# Altium PCB PCB1.PcbDoc (part 1 of 2)
Units mil, origin at the board's own origin, x right, y up, seen from the top; angles counter-clockwise.
Board outline 3937.01 x 3937.01 mil, 2 copper layers (Top Layer, Bottom Layer); 101 components, 66 nets, 397 pads, 63 vias.
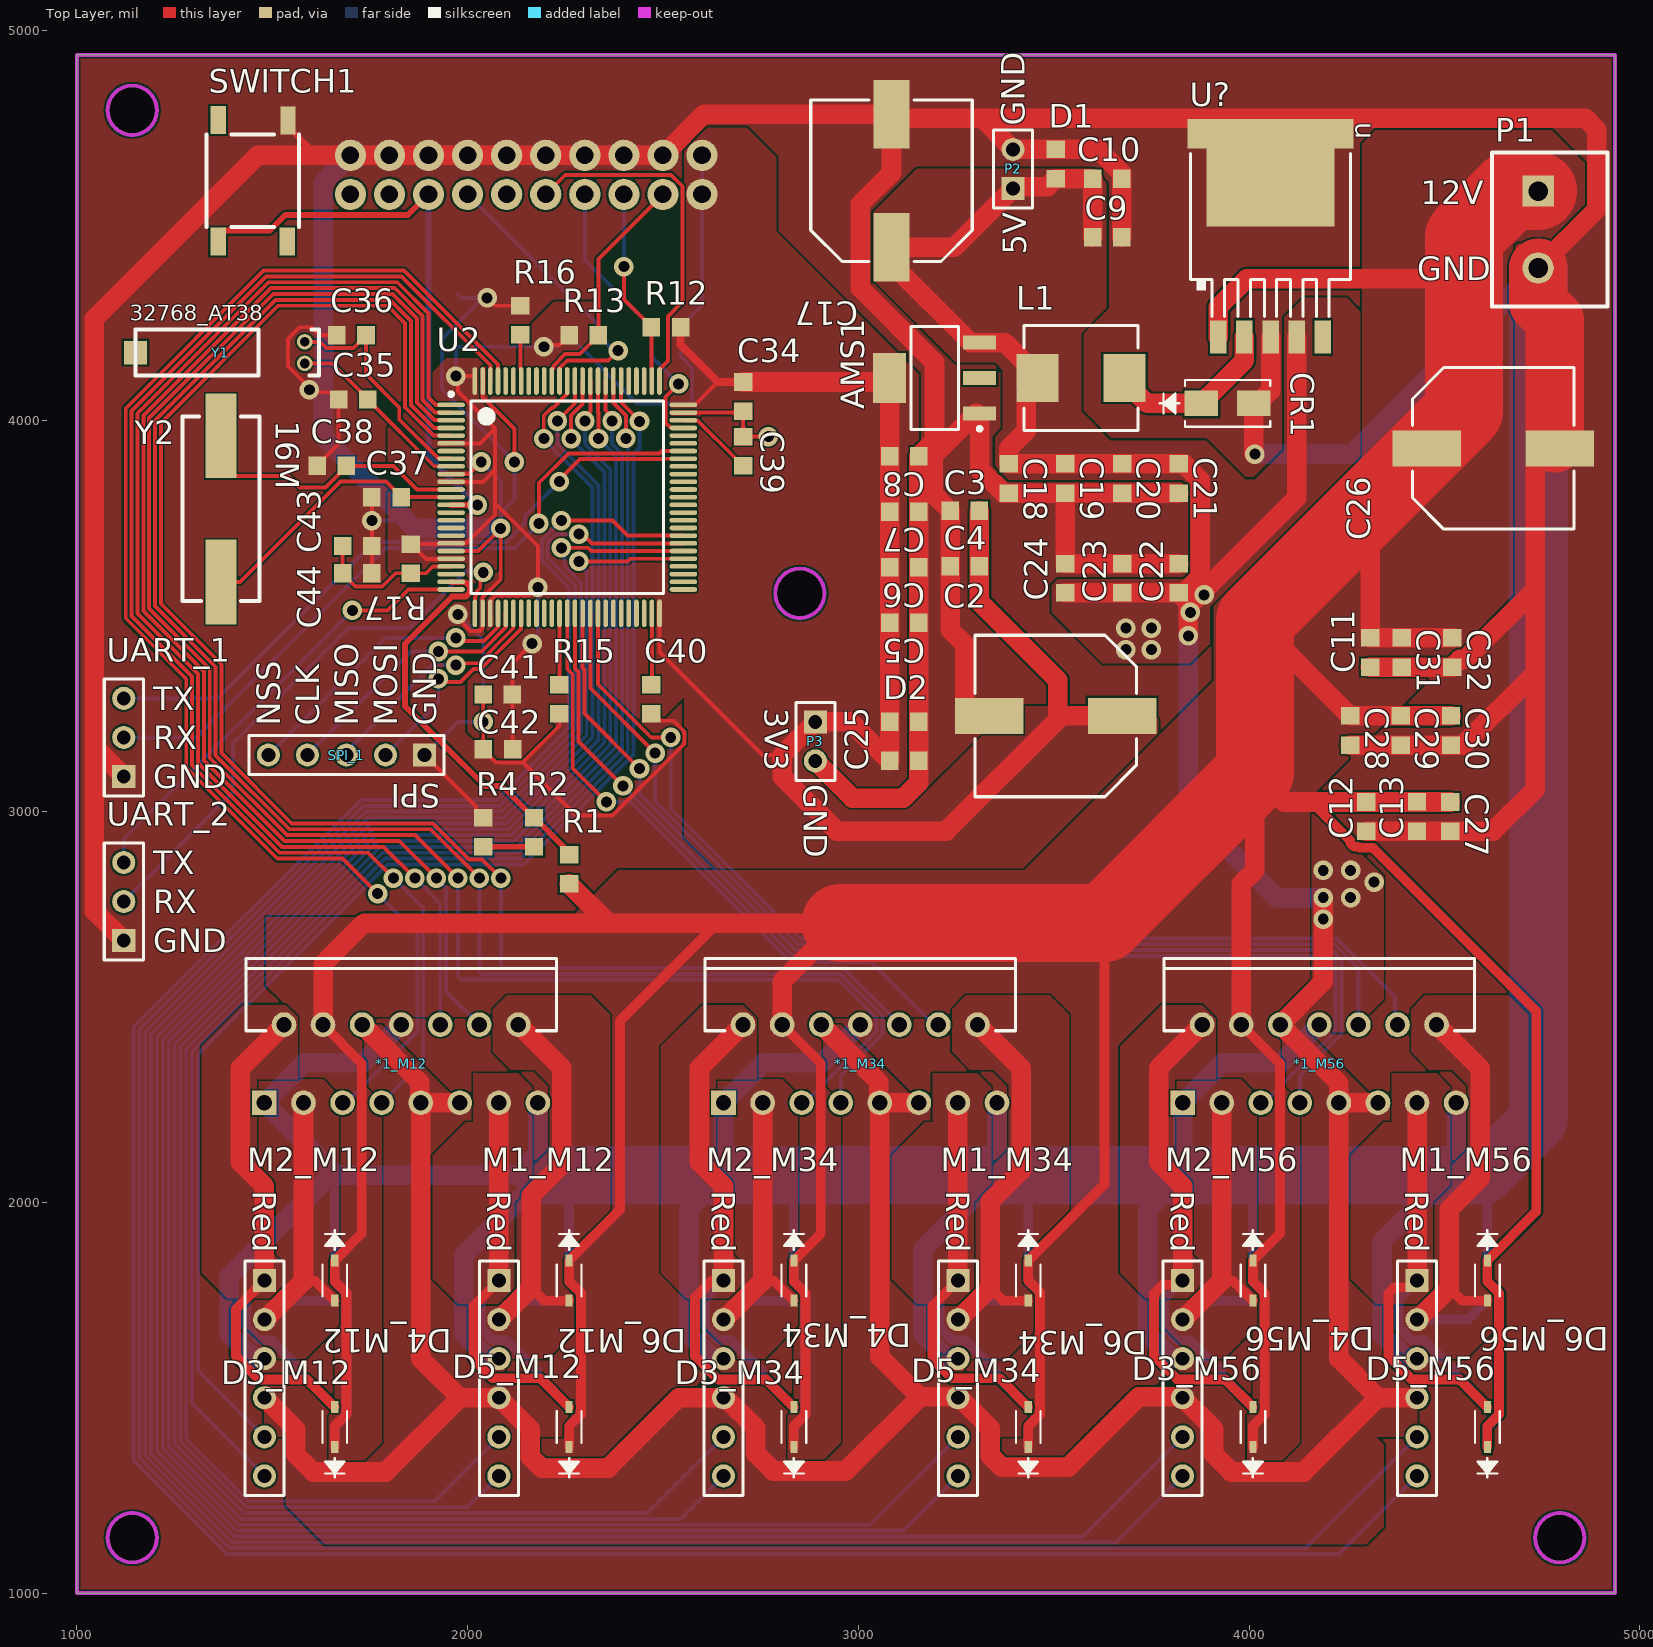
[diagram p0: Top Layer view]
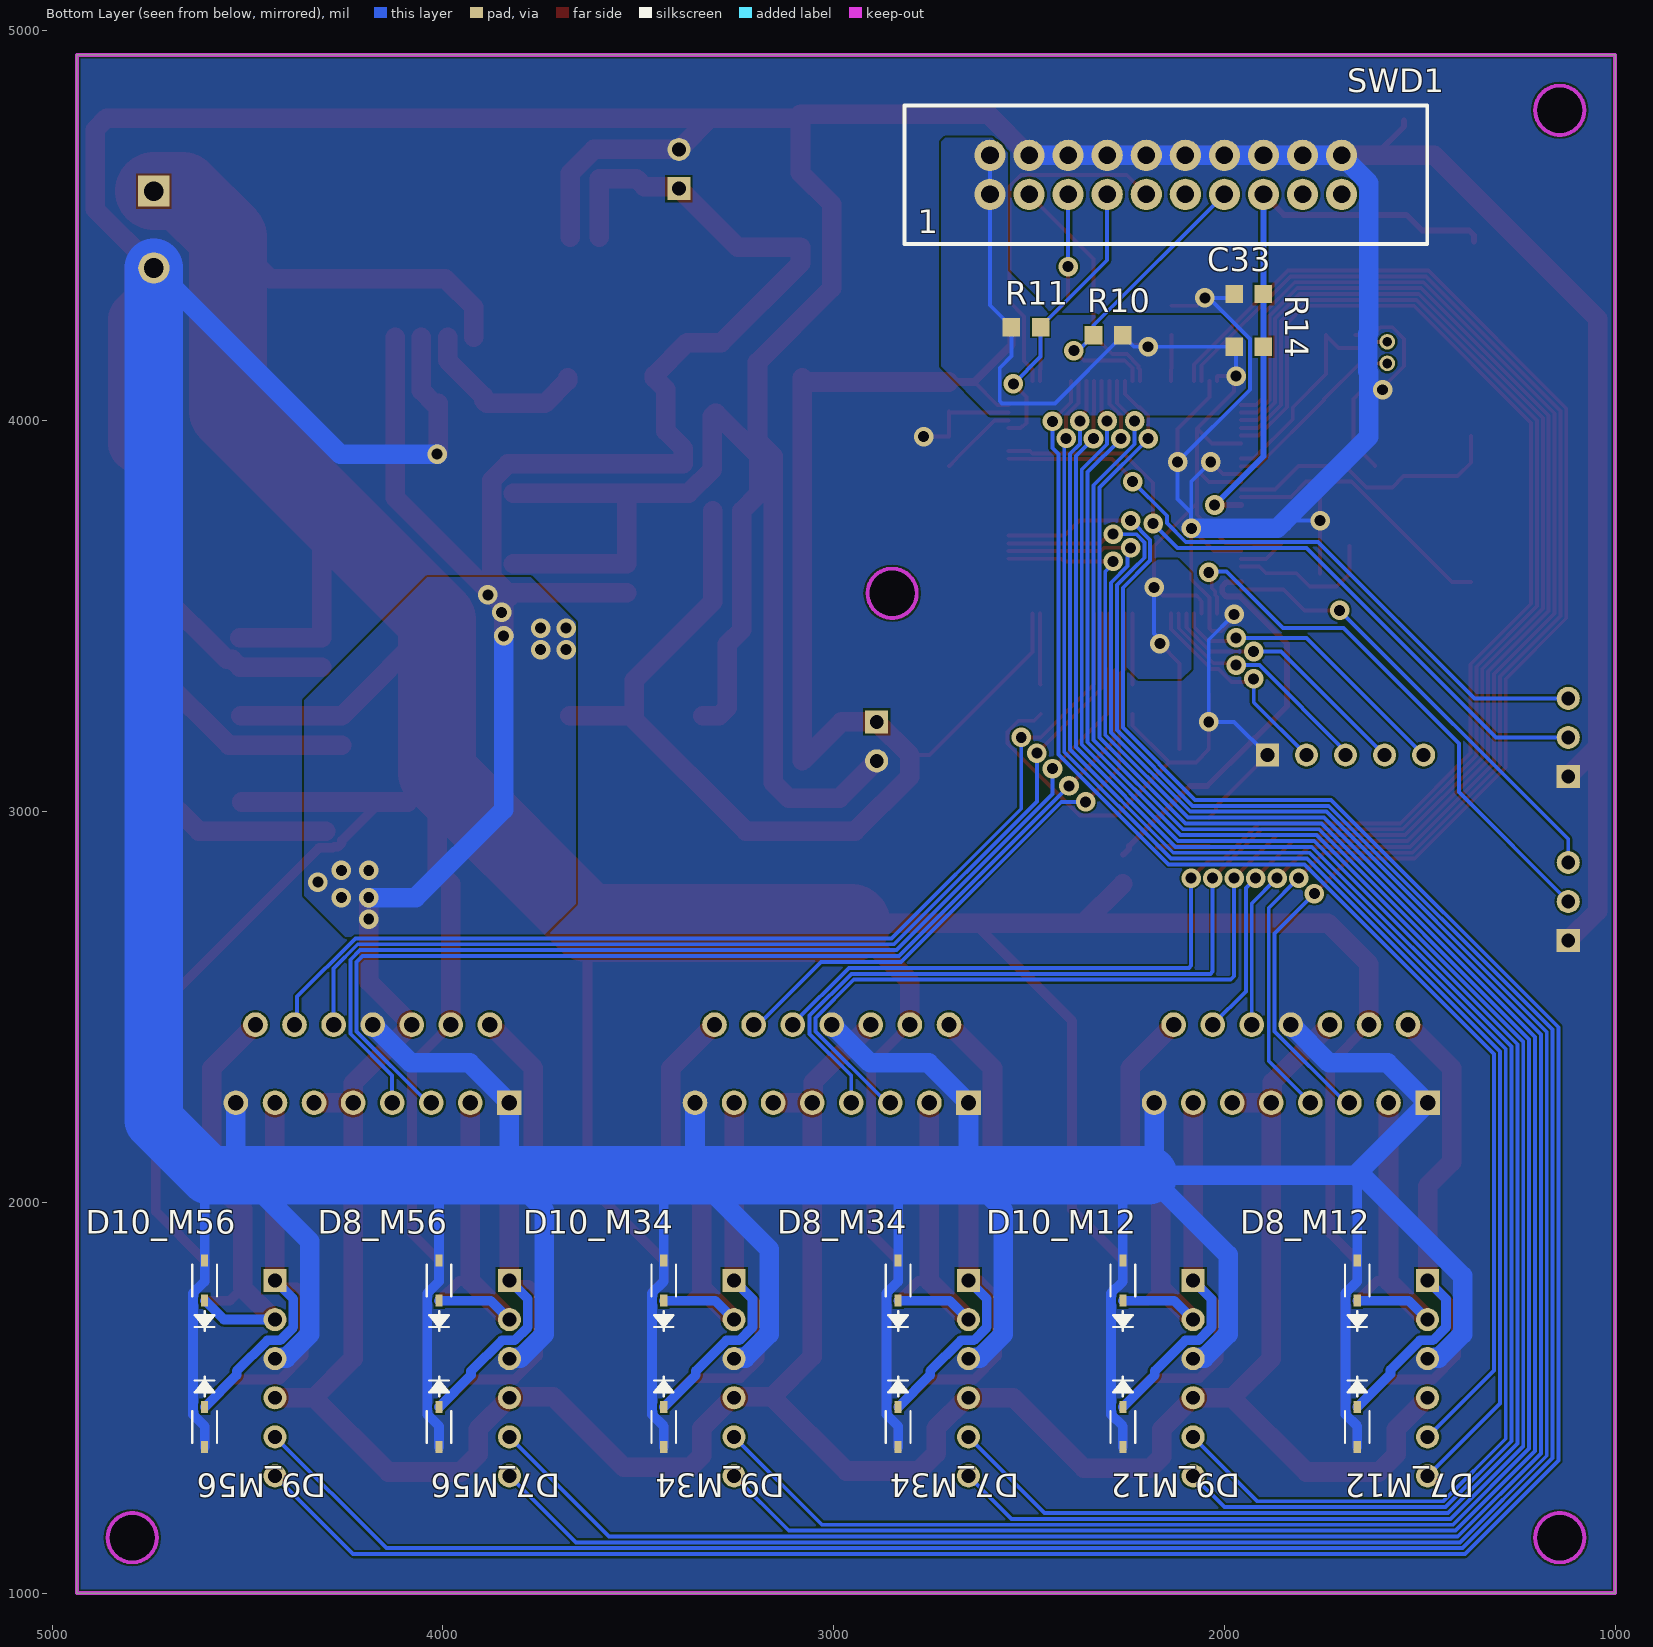
[diagram p1: Bottom Layer view, seen from below]
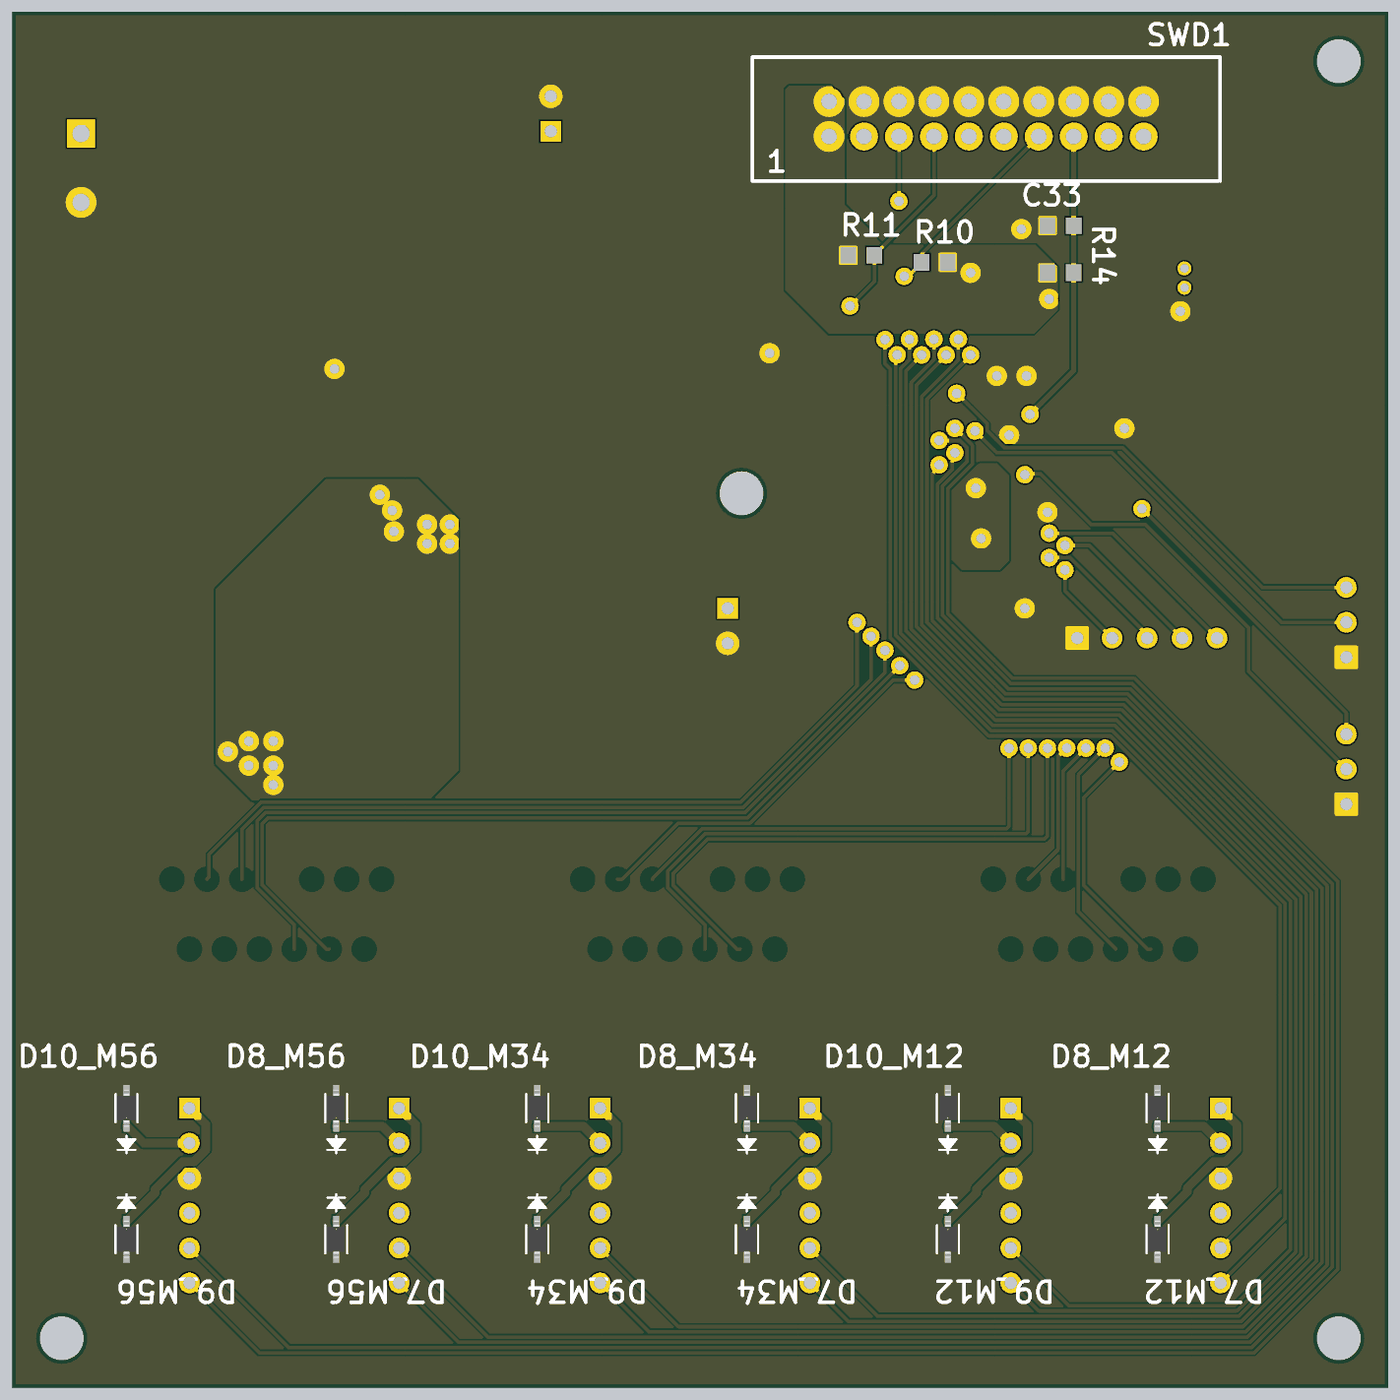
[diagram p3: 3D render of the assembled board from below, using the file's embedded part models]

## Layer stack, top to bottom
Top Solder: solder mask 0.4, Solder Resist, Dk 3.5
Top Layer: signal copper 1.4
Dielectric 1: dielectric 12.6, FR-4, Dk 4.8
Bottom Layer: signal copper 1.4
Bottom Solder: solder mask 0.4, Solder Resist, Dk 3.5

## Board outline
1000,1000 1000,4937.01 4937.01,4937.01 4937.01,1000
cut-out: 2850.39,3496.06 cw(c2850.39,3559.06) 2787.4,3559.06 cw(c2850.39,3559.06) 2850.39,3622.05 cw(c2850.39,3559.06) 2913.39,3559.06 cw(c2850.39,3559.06)
cut-out: 4732.28,1141.73 ccw(c4795.28,1141.73) 4795.28,1078.74 ccw(c4795.28,1141.73) 4858.27,1141.73 ccw(c4795.28,1141.73) 4795.28,1204.72 ccw(c4795.28,1141.73)
cut-out: 1141.73,1078.74 cw(c1141.73,1141.73) 1078.74,1141.73 cw(c1141.73,1141.73) 1141.73,1204.72 cw(c1141.73,1141.73) 1204.72,1141.73 cw(c1141.73,1141.73)
cut-out: 1141.73,4732.28 cw(c1141.73,4795.28) 1078.74,4795.28 cw(c1141.73,4795.28) 1141.73,4858.27 cw(c1141.73,4795.28) 1204.72,4795.28 cw(c1141.73,4795.28)

## Design rules (kind name [scope] priority, off if disabled: settings)
Clearance [All] p1: gap=5 ignorepadtopadclearanceinfootprint=FALSE
PlaneConnect [All] p1: planeconnectstyle=Direct reliefexpansion=20 reliefentries=4 reliefconductorwidth=10 reliefairgap=10
PolygonConnect [All] p1: connectstyle=Direct reliefconductorwidth=10 reliefentries=4 polygonreliefangle="90 Angle" airgapwidth=10
RoomDefinition POWER [InComponentClass('POWER')] p1: confinementstyle=ConfineIn formatcopy=TRUE lockcomponents=FALSE outline 2000,2755 4930,2755 4930,4930 2000,4930
RoomDefinition STM32F407VET6 [InComponentClass('STM32F407VET6')] p2: confinementstyle=ConfineIn formatcopy=TRUE lockcomponents=FALSE outline 1005,3095 2830,3095 2830,4930 1005,4930
RoomDefinition COM [InComponentClass('COM')] p3: confinementstyle=ConfineIn formatcopy=TRUE lockcomponents=FALSE outline 1980,2608.49 1980,3473.43 1015,3473.43 1015,2608.49
RoomDefinition M12 [InComponentClass('M12')] p4: confinementstyle=ConfineIn formatcopy=TRUE lockcomponents=FALSE outline 2580,2650 1410,2650 1410,1055 2580,1055
RoomDefinition M34 [InComponentClass('M34')] p5: confinementstyle=ConfineIn formatcopy=TRUE lockcomponents=FALSE outline 3755,2650 2585,2650 2585,1055 3755,1055
RoomDefinition M56 [InComponentClass('M56')] p6: confinementstyle=ConfineIn formatcopy=TRUE lockcomponents=FALSE outline 3760,1055 4930,1055 4930,2650 3760,2650
RoutingVias [All] p1: holewidth=28 width=50 viastyle="Through Hole" minholewidth=28 minwidth=50 maxholewidth=28 maxwidth=50
SolderMaskExpansion [All] p1: expansion=4 istentingtop=FALSE
Width [All] p1: maxlimit=500 minlimit=10 preferedwidth=10
29 further rules are at their usual default settings.

## Classes and differential pairs
component class M56: *1_M56 D3_M56 D4_M56 D5_M56 D6_M56 D7_M56 D8_M56 D9_M56 D10_M56 M1_M56 M2_M56
component class M34: *1_M34 D3_M34 D4_M34 D5_M34 D6_M34 D7_M34 D8_M34 D9_M34 D10_M34 M1_M34 M2_M34
component class M12: *1_M12 D3_M12 D4_M12 D5_M12 D6_M12 D7_M12 D8_M12 D9_M12 D10_M12 M1_M12 M2_M12
component class COM: SPI_1 UART_1 UART_2
channel class MOTOR: MOTOR1 MOTOR2
net class M6EC[1..2]: M6EC1 M6EC2
net class M6CTL[1..2]: M6CTL1 M6CTL2
net class M5EC[1..2]: M5EC1 M5EC2
net class M5CTL[1..2]: M5CTL1 M5CTL2
net class M4EC[1..2]: M4EC1 M4EC2
net class M4CTL[1..2]: M4CTL1 M4CTL2
net class M3EC[1..2]: M3EC1 M3EC2
net class M3CTL[1..2]: M3CTL1 M3CTL2
net class M2EC[1..2]: M2EC1 M2EC2
net class M2CTL[1..2]: M2CTL1 M2CTL2
net class M1EC[1..2]: M1EC1 M1EC2
net class M1CTL[1..2]: M1CTL1 M1CTL2
component class STM32F407VET6: C33 C34 C35 C36 C37 C38 C39 C40 C41 C42 C43 C44 R10 R11 R12 R13 R14 R15 R16 R17 SWD1 SWITCH1 U2 Y1 Y2
component class POWER: AMS1 AMS2 C2 C3 C4 C5 C6 C7 C8 C9 C10 C11 C12 C13 C17 C18 C19 C20 C21 C22 C23 C24 C25 C26 C27 C28 C29 C30 C31 C32 CR1 D1 D2 L1 P1 P2 P3 R1 R2 R4 U?

## Components (designator, comment, footprint, x,y, rotation, side; value= is the part's Value field where it differs from the comment)
*1_M12 "L298N" L298N-DIP -47609.15,51453.23 r90 top (schematic designator *1)
*1_M34 "L298N" L298N-DIP -46434.15,51453.23 r90 top (schematic designator *1)
*1_M56 "L298N" L298N-DIP -45259.15,51453.23 r90 top (schematic designator *1)
AMS1 "AMS1117" AMS1117 3195.5,4110 r180 top
C2 "470uF" 电解电容10*10.5mm 3505,3245 r180 top value=100pF
C3 "104" MY0805 3235.2,3770.28 r0 top
C4 "104" MY0805 3235.2,3628.22 r0 top
C5 "104" MY0805 3154.8,3483.83 r180 top
C6 "106" MY0805 3154.8,3625.89 r180 top value=104
C7 "106" MY0805 3154.8,3767.94 r180 top value=104
C8 "106" MY0805 3154.8,3910 r180 top value=104
C9 "47uF" MY0805 3674.8,4470 r180 top value=4.7uF
C10 "47uF" MY0805 3674.8,4620 r180 top value=4.7uF
C11 "4.7uF" MY0805 4310,3370 r90 top
C12 "4.7uF" MY0805 4300,2950 r90 top
C13 "10nF" MY0805 4430,2950.2 r90 top value=4.7uF
C17 "470uF" 电解电容10*10.5mm 3085,4615 r90 top value=100pF
C18 "104" MY0805 3385,3815.2 r90 top value=106
C19 "104" MY0805 3530,3815.2 r90 top value=106
C20 "104" MY0805 3675,3815.2 r90 top value=106
C21 "106" MY0805 3820,3815.2 r90 top
C22 "106" MY0805 3820,3634.8 r270 top
C23 "106" MY0805 3675,3634.8 r270 top
C24 "22uF" MY0805 3530,3560.2 r90 top
C25 "22uF" MY0805 3080,3130 r0 top
C26 "470uF" 电解电容10*10.5mm 4625,3930 r0 top value=100pF
C27 "106" MY0805 4515,2950 r90 top
C28 "106" MY0805 4259,3170.28 r90 top
C29 "106" MY0805 4388,3170.28 r90 top
C30 "106" MY0805 4517,3170.28 r90 top
C31 "106" MY0805 4391,3370.28 r90 top
C32 "106" MY0805 4520,3370.28 r90 top
C33 "106" MY0805 1974.8,4325 r180 bottom
C34 "104" MY0805 2705,4025 r90 top
C35 "6pF" MY0805 1744.8,4055 r180 top value=20PF
C36 "6pF" MY0805 1740,4220 r180 top value=20PF
C37 "20pF" MY0805 1829.8,3805 r180 top value=20PF
C38 "20pF" MY0805 1689.8,3885 r180 top value=20PF
C39 "2.2uF" MY0805 2705,3959.8 r270 top
C40 "2.2uF" MY0805 2470,3250.2 r90 top
C41 "102" MY0805 2040,3300 r0 top
C42 "106" MY0805 2115,3160 r180 top
C43 "106" MY0805 1680.2,3680 r0 top
C44 "106" MY0805 1680.2,3610 r0 top
CR1 "B340A-E3/61T" DO-214AC_VIS 3945,4045 r0 top
D1 "LED2" MY0805 3505,4620.2 r90 top
D2 "LED2" MY0805 3080,3230 r0 top
D3_M12 "二极管" SOD-323 1660,1425 r90 top (schematic designator D3)
D3_M34 "二极管" SOD-323 2835,1425 r90 top (schematic designator D3)
D3_M56 "二极管" SOD-323 4010,1425 r90 top (schematic designator D3)
D4_M12 "二极管" SOD-323 1660,1800 r270 top (schematic designator D4)
D4_M34 "二极管" SOD-323 2835,1800 r270 top (schematic designator D4)
D4_M56 "二极管" SOD-323 4010,1800 r270 top (schematic designator D4)
D5_M12 "二极管" SOD-323 2260,1425 r90 top (schematic designator D5)
D5_M34 "二极管" SOD-323 3435,1425 r90 top (schematic designator D5)
D5_M56 "二极管" SOD-323 4610,1425 r90 top (schematic designator D5)
D6_M12 "二极管" SOD-323 2260,1800 r270 top (schematic designator D6)
D6_M34 "二极管" SOD-323 3435,1800 r270 top (schematic designator D6)
D6_M56 "二极管" SOD-323 4610,1800 r270 top (schematic designator D6)
D7_M12 "二极管" SOD-323 1660,1425 r270 bottom (schematic designator D7)
D7_M34 "二极管" SOD-323 2835,1425 r270 bottom (schematic designator D7)
D7_M56 "二极管" SOD-323 4010,1425 r270 bottom (schematic designator D7)
D8_M12 "二极管" SOD-323 1660,1800 r90 bottom (schematic designator D8)
D8_M34 "二极管" SOD-323 2835,1800 r90 bottom (schematic designator D8)
D8_M56 "二极管" SOD-323 4010,1800 r90 bottom (schematic designator D8)
D9_M12 "二极管" SOD-323 2260,1425 r270 bottom (schematic designator D9)
D9_M34 "二极管" SOD-323 3435,1425 r270 bottom (schematic designator D9)
D9_M56 "二极管" SOD-323 4610,1425 r270 bottom (schematic designator D9)
D10_M12 "二极管" SOD-323 2260,1800 r90 bottom (schematic designator D10)
D10_M34 "二极管" SOD-323 3435,1800 r90 bottom (schematic designator D10)
D10_M56 "二极管" SOD-323 4610,1800 r90 bottom (schematic designator D10)
L1 "10uH" 电感0603_10uH 3570,4110 r180 top
M1_M12 "MOTOR" "MOTOR_PORT ClearVer" 2080,1800 r270 top (schematic designator M1)
M1_M34 "MOTOR" "MOTOR_PORT ClearVer" 3255,1800 r270 top (schematic designator M1)
M1_M56 "MOTOR" "MOTOR_PORT ClearVer" 4430,1800 r270 top (schematic designator M1)
M2_M12 "MOTOR" "MOTOR_PORT ClearVer" 1480,1800 r270 top (schematic designator M2)
M2_M34 "MOTOR" "MOTOR_PORT ClearVer" 2655,1800 r270 top (schematic designator M2)
M2_M56 "MOTOR" "MOTOR_PORT ClearVer" 3830,1800 r270 top (schematic designator M2)
P1 "12V接线座" 16A_5.0mm接线座 4740,4490 r270 top
P2 "5V" POWER_PORT 3395.99,4595 r90 top
P3 "3V3" POWER_PORT 2890,3230 r270 top
R1 "10K" MY0805 2260,2815.2 r90 top
R2 "1K" MY0805 2170,2910.2 r90 top
R4 "1K" MY0805 2040,2985 r270 top
R10 "1K" MY0805 2335,4220 r180 bottom
R11 "1K" MY0805 2470.2,4240 r0 bottom
R12 "1K" MY0805 2470.2,4240 r0 top
R13 "1K" MY0805 2334.8,4220 r180 top
R14 "10K" MY0805 1975,4190 r180 bottom
R15 "1K" MY0805 2235,3325 r270 top
R16 "10K" MY0805 2135,4220.2 r90 top
R17 "0R" MY0805 1855,3685 r270 top
SPI_1 "SPI" SPI 1890,3145 r180 top
SWD1 "SWD/JTAG 20Pin" "SWD 20Pin" 2150,4630 r180 bottom
SWITCH1 "开关" 开关 1450,4615 r270 top
U2 "STM32F407VET6" STM-LQFP100_N 2255,3804.95 r0 top
U? "LM2596S-5.0/NOPB" KTT0005B 4055,4425 r270 top
UART_1 "UART" UART 1120,3090 r90 top
UART_2 "UART" UART 1120,2670 r90 top
Y1 "晶振32768" 晶振32768K_AT38 1465,4175 r90 top
Y2 "晶振16M" 晶振16M 1368.57,3775 r270 top

## Footprints (in the part's own frame and the unit in brackets; to place one, negate y for a bottom-side part, rotate by r counter-clockwise, add the part's x,y. Pads: shape width x height; smd on the part's side, far side on the other; paste and mask are expansions set on the pad)
16A_5.0mm接线座 [mil] "12V"
  rect 80x80 hole 50: 1(-98.43,0)
  round 80 hole 50: 2(98.43,0)
  silkscreen extent -197,-118 197,177
AMS1117 [mm] "SOT223, 4-Leads, Body 6.50x7.00mm (avg), Pitch 2.30mm, IPC Medium Density"
  rect 2.15x0.9 smd: 1(-2.925,2.3) 2(-2.925,0) 3(-2.925,-2.3)
  rect 2.15x3.25 smd: 2(2.925,0)
  silkscreen extent -3.05,-3.35 1.55,3.42, body extent -1.85,-3.35 1.85,3.35, height 1.8
DO-214AC_VIS [mil]
  rect 86x65 smd paste+0 mask+0: 1(-67,0) 2(67,0)
  silkscreen extent -174,-60 109,60, body extent -104,-55 104,55, height 92
KTT0005B [mm]
  rect 2.16x1.07 smd paste-0.102 mask+0.051: 1(5.338,-3.4) 2(5.338,-1.7) 3(5.338,0.005) 4(5.338,1.7) 5(5.338,3.4)
  rect 1.905x1.397 smd: 6(-7.874,4.699) 6(-7.874,-4.699)
  rect 6.99x8.33 smd paste-0.102 mask+0.051: 6(-5.338,0)
  silkscreen extent -6.6,-5.2 4,5.2, body extent 0,0 0.25,0.25, height 0.25
L298N-DIP [mm]
  rect 1.6x1.6 hole 1: 1(-1249.635,-1246.864)
  round 1.6 hole 1: 2(-1244.555,-1248.134) 3(-1249.635,-1249.404) 4(-1244.555,-1250.674) 5(-1249.635,-1251.944) 6(-1244.555,-1253.214) 7(-1249.635,-1254.484) 8(-1244.555,-1255.754) 9(-1249.635,-1257.024) 10(-1244.555,-1258.294) 11(-1249.635,-1259.564) 12(-1244.555,-1260.834) 13(-1249.635,-1262.104) 14(-1244.555,-1263.374) 15(-1249.635,-1264.644)
  silkscreen extent -1244.95,-1265.85 -1240.25,-1245.65
"MOTOR_PORT ClearVer" [mm]
  rect 1.5x1.5 hole 0.9: 1(0,0)
  round 1.5 hole 0.9: 2(2.54,0) 3(5.08,0) 4(7.62,0) 5(10.16,0) 6(12.7,0)
  silkscreen extent -1.27,-1.27 13.97,1.27
MY0805 [mm]
  rect 1.14x1.2 smd: 1(0,0) 2(1.9,0)
POWER_PORT [mm]
  rect 1.5x1.5 hole 0.9: 1(0,0)
  round 1.5 hole 0.9: 2(2.54,0)
  silkscreen extent -1.27,-1.27 3.81,1.27
SOD-323 [mil]
  rect 31x18 smd paste+0 mask+0: 1(-51.5,0) 2(51.5,0)
  silkscreen extent -129,-32 40,32, body extent -53,-26 53,26, height 39
SPI [mm]
  rect 1.5x1.5 hole 0.9: 1(0,0)
  round 1.5 hole 0.9: 2(2.54,0) 3(5.08,0) 4(7.62,0) 5(10.16,0)
  silkscreen extent -1.27,-1.27 11.43,1.27
STM-LQFP100_N [mm] "Thin QFP, 100-Leads, Body 14x14mm, Pitch 0.5mm, IPC Medium Density"
  oval 1.8x0.3 smd: 1(-7.55,6) 2(-7.55,5.5) 3(-7.55,5) 4(-7.55,4.5) 5(-7.55,4) 6(-7.55,3.5) 7(-7.55,3) 8(-7.55,2.5) 9(-7.55,2) 10(-7.55,1.5) 11(-7.55,1) 12(-7.55,0.5) 13(-7.55,0) 14(-7.55,-0.5) 15(-7.55,-1) 16(-7.55,-1.5) 17(-7.55,-2) 18(-7.55,-2.5) 19(-7.55,-3) 20(-7.55,-3.5) 21(-7.55,-4) 22(-7.55,-4.5) 23(-7.55,-5) 24(-7.55,-5.5) 25(-7.55,-6) 51(7.55,-6) 52(7.55,-5.5) 53(7.55,-5) 54(7.55,-4.5) 55(7.55,-4) 56(7.55,-3.5) 57(7.55,-3) 58(7.55,-2.5) 59(7.55,-2) 60(7.55,-1.5) 61(7.55,-1) 62(7.55,-0.5) 63(7.55,0) 64(7.55,0.5) 65(7.55,1) 66(7.55,1.5) 67(7.55,2) 68(7.55,2.5) 69(7.55,3) 70(7.55,3.5) 71(7.55,4) 72(7.55,4.5) 73(7.55,5) 74(7.55,5.5) 75(7.55,6)
  oval 0.3x1.8 smd: 26(-6,-7.55) 27(-5.5,-7.55) 28(-5,-7.55) 29(-4.5,-7.55) 30(-4,-7.55) 31(-3.5,-7.55) 32(-3,-7.55) 33(-2.5,-7.55) 34(-2,-7.55) 35(-1.5,-7.55) 36(-1,-7.55) 37(-0.5,-7.55) 38(0,-7.55) 39(0.5,-7.55) 40(1,-7.55) 41(1.5,-7.55) 42(2,-7.55) 43(2.5,-7.55) 44(3,-7.55) 45(3.5,-7.55) 46(4,-7.55) 47(4.5,-7.55) 48(5,-7.55) 49(5.5,-7.55) 50(6,-7.55) 76(6,7.55) 77(5.5,7.55) 78(5,7.55) 79(4.5,7.55) 80(4,7.55) 81(3.5,7.55) 82(3,7.55) 83(2.5,7.55) 84(2,7.55) 85(1.5,7.55) 86(1,7.55) 87(0.5,7.55) 88(0,7.55) 89(-0.5,7.55) 90(-1,7.55) 91(-1.5,7.55) 92(-2,7.55) 93(-2.5,7.55) 94(-3,7.55) 95(-3.5,7.55) 96(-4,7.55) 97(-4.5,7.55) 98(-5,7.55) 99(-5.5,7.55) 100(-6,7.55)
  silkscreen extent -7.67,-6.25 6.25,6.82, body extent -7,-7 7,7, height 1.6
"SWD 20Pin" [mil]
  round 80 hole 45: 1(-450,-50) 2(-450,50) 3(-350,-50) 4(-350,50) 5(-250,-50) 6(-250,50) 7(-150,-50) 8(-150,50) 9(-50,-50) 10(-50,50) 11(50,-50) 12(50,50) 13(150,-50) 14(150,50) 15(250,-50) 16(250,50) 17(350,-50) 18(350,50) 19(450,-50) 20(450,50)
  silkscreen extent -669,-177 669,177
UART [mm]
  rect 1.5x1.5 hole 0.9: 1(0,0)
  round 1.5 hole 0.9: 2(2.54,0) 3(5.08,0)
  silkscreen extent -1.27,-1.27 6.35,1.27
开关 [mm]
  rect 1.8x1 smd: 1(-3.916,2.293) 2(3.95,2.25) 3(-3.95,-2.25) 4(3.95,-2.25)
  silkscreen extent -3,-3 3,3
晶振16M [mm]
  rect 5.5x2 smd: 1(-4.75,0) 2(4.75,0)
  silkscreen extent -6,-2.5 6,2.5
晶振32768K_AT38 [mil]
  round 40 hole 25: 1(-27.56,-118.11) 2(27.56,-118.11)
  rect 60x60 smd: 4(0,314.96)
  silkscreen extent -59,-155 59,315
电感0603_10uH [mm] "Molded Inductor, 2-Leads, Body 7.20x6.60mm, IPC Medium Density"
  rect 2.75x3.1 smd: 1(-2.825,0) 2(2.825,0)
  silkscreen extent -3.7,-3.4 3.7,3.4, body extent -3.7,-3.4 3.7,3.4, height 3
电解电容10*10.5mm [mm] "Aluminum Electrolytic Capacitor, Body 10.30x10.30x10.50mm, IPC Low Density"
  rect 4.45x2.35 smd: 1(-4.325,0) 2(4.325,0)
  silkscreen extent -5.25,-5.25 5.25,5.25, body extent -5.25,-5.25 5.25,5.25, height 10.5

## Part data
C2 C17 C26: library part "Cap Pol1", "Polarized Capacitor (Radial)", LatestRevisionDate=17-Jul-2002, LatestRevisionNote="Re-released for DXP Platform.", PackageDescription="Polarized Capacitor (Radial); 2 Leads", PackageReference=RB7.6-15, Published=8-Jun-2000, Publisher="Altium Limited"
C3 C4 C5 C6 C7 C8 C9 C10 C11 C12 C13 C18 C19 C20 C21 C22 C23 C27 C28 C29 C30 C31 C32 C33 C34 C35 C36 C37 C38 C39 C40 C41 C42 C43 C44: library part Cap, "Capacitor", LatestRevisionDate=17-Jul-2002, LatestRevisionNote="Re-released for DXP Platform.", PackageDescription="Radial Cap, Thru-Hole; 2 Leads; 0.3 in Pin Spacing", PackageReference=RAD-0.3, Published=8-Jun-2000, Publisher="Altium Limited"
C24 C25: library part "Cap Pol2", "Polarized Capacitor (Axial)", LatestRevisionDate=17-Jul-2002, LatestRevisionNote="Re-released for DXP Platform.", PackageDescription="Polarized Capacitor; 2 Leads", PackageReference=POLAR0.8, Published=8-Jun-2000, Publisher="Altium Limited"
CR1: "No Description Available", Mfr_Name=Vishay, Copyright="Copyright (C) 2022 Ultra Librarian. All rights reserved.", Manufacturer_Part_Number=B340A-E3/61T, RefDes=RefDes, Type=DEV
D1 D2: "Typical RED, GREEN, YELLOW, AMBER GaAs LED", LatestRevisionDate=17-Jul-2002, LatestRevisionNote="Re-released for DXP Platform.", PackageDescription="SM LED; 2 Flat Leads", PackageReference=3.2X1.6X1.1, PackageVersion=Feb-2002, Published=8-Jun-2000, Publisher="Altium Limited"
D3_M12 D3_M34 D3_M56 D4_M12 D4_M34 D4_M56 D5_M12 D5_M34 D5_M56 D6_M12 D6_M34 D6_M56 D7_M12 D7_M34 D7_M56 D8_M12 D8_M34 D8_M56 D9_M12 D9_M34 D9_M56 D10_M12 D10_M34 D10_M56: library part "二极管 SOD323"
L1: library part Inductor, "Inductor", Code_IEC=1005, Code_JEITA=0402, LatestRevisionDate=29-May-2009, LatestRevisionNote="IPC-7351 Footprint Added.", PackageDescription="Chip Inductor", PackageReference=0402-A, Published=8-Jun-2000, Publisher="Altium Limited"
M1_M12 M1_M34 M1_M56 M2_M12 M2_M34 M2_M56: library part MOTOR_Port
P2 P3: library part "Header 2", "Header, 2-Pin", LatestRevisionDate=17-Jul-2002, LatestRevisionNote="Re-released for DXP Platform.", Publisher="Altium Limited"
R1 R2 R4 R10 R11 R12 R13 R14 R15 R16 R17: library part Res3, "Resistor", LatestRevisionDate=29-May-2009, LatestRevisionNote="IPC-7351 Footprint Added.", PackageDescription="Chip Resistor", PackageReference=J1-0603, Published=8-Jun-2000, Publisher="Altium Limited"
U2: "ARM Cortex-M4 32-bit MCU+FPU, 210 DMIPS, 512 kB Flash, 192 kB Internal RAM, 82 I/Os, 100-pin LQFP, -40 to 85 degC, Tray", I/Os (High Current)=82, Manufacturer=STMicroelectronics, Operating Frequency(F) (Processor speed) (MHz)=168, Supplier Part Number 1=497-12075-ND, Supply Voltage(Vcc) max (V)=3.6, Supply Voltage(Vcc) min (V)=1.8, ComponentLink1Description="Manufacturer URL", ComponentLink1URL=http://www.st.com/web/en/home.html, ComponentLink2Description=Datasheet, ComponentLink2URL=http://www.st.com/st-web-ui/static/active/en/resource/technical/document/datasheet/DM00037051.pdf, ComponentLink3Description="Package Specification", ComponentLink3URL=http://www.st.com/st-web-ui/static/active/en/resource/technical/document/data_brief/DM00071938.pdf, Core="ARM Cortex-M4", D/A Converter=2x12-bit, DatasheetVersion="Rev. 4", FLASH Size (Prog) (kB)=512, Internal RAM Size (kB)=192, Mounting Technology="Surface Mount", PackageDescription="100-Pin Low Profile Quad Flat Package, 14 x 14 mm Body, 0.5 mm Pitch", PackageReference=LQFP100, PackageVersion="Rev. 1, 06/2013", Packing=Tray, PartNumber=STM32F407VET6, Supplier 1=Digi-Key, Supplier 2=Farnell, Supplier 3=Newark, Supplier 4=Mouser, Supplier Part Number 2=2064367, Supplier Part Number 3=73T2332, Supplier Part Number 4=511-STM32F407VET6
U?: "No Description Available", Alternate_PartNumber=LM2596S-ADJ/NOPB, Manufacturer="Texas Instruments", PartNumber=LM2596SX-ADJ/NOPB, CompType=IC, Copyright="Copyright (C) 2022 Ultra Librarian. All rights reserved.", Manufacturer_Part_Number=LM2596S-5.0/NOPB, Mfr_Name="Texas Instruments", MountType=SMT, PackageReference=KTT0005B, RefDes=RefDes, RoHS=Y, Type=DEV
Y1 Y2: library part 晶振

## Via types
v1: diameter 50, hole 28, Top Layer to Bottom Layer, 63 vias

## Nets (pads, with @x,y where several pads share a name; then routed paths per layer and width w, separated by ;. In a path a pad name is that pad's centre, name@x,y a point inside that pad or via, vN(x,y) a via of type N, cw(c..) or ccw(c..) an arc to the next point about the centre after c; other vN are vias at no path point)
+5: *1_M12.6 *1_M12.9 *1_M12.11 *1_M34.6 *1_M34.9 *1_M34.11 *1_M56.6 *1_M56.9 *1_M56.11 AMS1.3 C9.2 C10.2 C17.1 C18.2 C19.2 C20.2 C21.2 C22.2 C23.2 C24.1 D1.1 L1.2 M1_M12.4 M1_M34.4 M1_M56.4 M2_M12.4 M2_M34.4 M2_M56.4 P2.1 U?.4 | length 12219.8
  Top Layer w50: M2_M12.4@1480,1500 1560.15,1419.85 1560.15,1354.85 1605,1310 1790,1310 1980,1500 ; *1_M12.6@1730,2455 1877.51,2307.49 1877.51,2257.49 *1_M12.9@1880,2255 1880,1600 1980,1500 ; *1_M12.9@1877.51,2252.49 1875,2255 *1_M12.11@1980,2255 ; M2_M34.4@2655,1500 2540,1500 2360,1320 2189.44,1320 2160.15,1349.29 2160.15,1419.85 M1_M12.4@2080,1500 1980,1500 ; M2_M34.4@2657.49,1502.51 2737.64,1422.36 2737.64,1357.36 2782.49,1312.51 2967.49,1312.51 3157.49,1502.51 ; *1_M34.6@2905,2455 3052.51,2307.49 3052.51,2257.49 *1_M34.9@3055,2255 ; *1_M34.11@3155,2255 *1_M34.9@3055,2255 ; C24.1@3530,3560.2 3819.8,3560.2 C22.2@3820,3560 ; C9.2@3600,4470 C10.2@3600,4620 3505.2,4620 D1.1@3505,4620.2 3484.33,4599.53 3400.52,4599.53 P2.1@3395.99,4595 3245.72,4444.72 C17.1@3085,4444.72 3085,4403.39 3287.83,4200.55 AMS1.3@3310.66,4200.55 3375.12,4200.55 3458.78,4116.89 L1.2@3458.78,4110 3429.65,4080.87 3429.65,3973.98 3385,3929.33 C18.2@3385,3890 C19.2@3530,3890 C20.2@3675,3890 C21.2@3820,3890 3833.69,3890 3875,3848.69 3875,3601.31 3833.69,3560 C22.2@3820,3560 ; M2_M56.4@3830,1500 3910.15,1419.85 3910.15,1354.85 3955,1310 4140,1310 4330,1500 ; M2_M56.4@3832.49,1502.51 3717.49,1502.51 3537.49,1322.51 3366.93,1322.51 3337.64,1351.8 3337.64,1422.36 3257.49,1502.51 3157.49,1502.51 ; v1(3845,3450) v1@3845,3526.14 ; *1_M56.6@4080,2455 4190,2565 v1(4190,2780) ; *1_M56.6@4082.49,2452.51 4229.7,2305.3 4229.7,2255.3 *1_M56.9@4230,2255 ; U?.4@4121.93,4214.86 4121.93,3803.07 v1@3845,3526.14 ; *1_M56.11@4330,2255 *1_M56.9@4230,2255 ; M1_M56.4@4430,1500 4330,1500 ; *1_M34.9@3055,2255 3055,1605 3157.49,1502.51 ; C22.2@3820,3560 3845,3535 v1@3845,3526.14 ; *1_M56.9@4230,2255 4230,1600 4330,1500
  Bottom Layer w50: v1(3845,3450) 3845,3005 4070,2780 v1(4190,2780)
  other v1: 4190,2725 4260,2780 4320,2820 4190,2850 4260,2850 3685,3415 3750,3415 3685,3470 3750,3470 3850,3510 3885,3555
+12: *1_M12.4 *1_M34.4 *1_M56.4 C11.2 C12.2 C13.2 C26.1 C27.2 C28.2 C29.2 C30.2 C31.2 C32.2 D3_M12.1 D3_M34.1 D3_M56.1 D4_M12.1 D4_M34.1 D4_M56.1 D5_M12.1 D5_M34.1 D5_M56.1 D6_M12.1 D6_M34.1 D6_M56.1 P1.1 R1.1 U?.1 | length 16650.6
  Top Layer w25: *1_M12.4@1630,2455 1729,2356 1729,1920.5 D4_M12.1@1660,1851.5 1660,1797.75 1690,1767.75 1690,1457.25 1660,1427.25 D3_M12.1@1660,1373.5 ; D5_M12.1@2260,1373.5 2260,1427.25 2290,1457.25 2290,1767.75 2260,1797.75 D6_M12.1@2260,1851.5 2390,1981.5 2390,2465 2630,2705 2630,2715 ; *1_M34.4@2805,2455 2904,2356 2904,1920.5 D4_M34.1@2835,1851.5 ; D4_M34.1@2834.5,1851.5 D4_M34.1@2835,1851.5 ; D3_M34.1@2835,1373.5 2835,1427.25 2865,1457.25 2865,1767.75 2835,1797.75 D4_M34.1@2835,1851.5 ; D5_M34.1@3435,1373.5 3435,1427.25 3465,1457.25 3465,1770 3435,1800 D6_M34.1@3435,1851.5 3630,2046.5 3630,2715 ; *1_M56.4@3980,2455 4079,2356 4079,1920.5 D4_M56.1@4010,1851.5 ; D4_M56.1@4009.5,1851.5 D4_M56.1@4010,1851.5 ; D3_M56.1@4010,1373.5 4010,1427.25 4040,1457.25 4040,1767.75 4010,1797.75 D4_M56.1@4010,1851.5 ; 4160.2,3024.8 4258.88,2926.12 4258.88,2920.31 4269.13,2910.06 4279.84,2910.06 4282.4,2907.5 4317.5,2907.5 4735,2490 4735,1976.5 D6_M56.1@4610,1851.5 4610,1797.75 4640,1767.75 4640,1457.25 4610,1427.25 D5_M56.1@4610,1373.5
  Top Layer w50: *1_M12.4@1630,2455 1630,2610 1735,2715 2360.2,2715 ; R1.1@2260,2815.2 2360.2,2715 ; *1_M34.4@2805,2455 2805,2565 2955,2715 2630,2715 2360.2,2715 ; U?.1@3921.14,4214.86 3921.14,4291.14 3994.57,4364.57 4443.31,4364.57 4550,4471.27 ; *1_M56.4@3980,2455 3980,2815 4015,2850 4015,3100 4090.2,3024.8 4160.2,3024.8 C12.2@4300,3024.8 4430,3024.8 C27.2@4515,3024.8 ; 4015,3489.08 C28.2@4259,3245.08 C29.2@4388,3245.08 C30.2@4517,3245.08 ; 4309.86,3785.14 4310,3785 C11.2@4310,3444.8 4519.72,3444.8 C32.2@4520,3445.08
  Top Layer w200: 2955,2715 3630,2715 4015,3100 4015,3489.08 4015,3490.28 4309.86,3785.14 C26.1@4454.72,3930 4550,4025.28 4550,4471.27 4667.16,4588.43 P1.1@4740,4588.43
GND: *1_M12.1 *1_M12.8 *1_M12.15 *1_M34.1 *1_M34.8 *1_M34.15 *1_M56.1 *1_M56.8 *1_M56.15 AMS1.1 C2.2 C3.1 C4.1 C5.1 C6.1 C7.1 C8.1 C9.1 C10.1 C11.1 C12.1 C13.1 C17.2 C18.1 C19.1 C20.1 C21.1 C22.1 C23.1 C24.2 C25.2 C26.2 C27.1 C28.1 C29.1 C30.1 C31.1 C32.1 C33.1 C34.1 C35.2 C36.2 C37.2 C38.2 C39.1 C40.1 C41.1 C42.2 C43.2 C44.2 CR1.2 D1.2 D2.2 D7_M12.2 D7_M34.2 D7_M56.2 D8_M12.2 D8_M34.2 D8_M56.2 D9_M12.2 D9_M34.2 D9_M56.2 D10_M12.2 D10_M34.2 D10_M56.2 M1_M12.3 M1_M34.3 M1_M56.3 M2_M12.3 M2_M34.3 M2_M56.3 P1.2 P2.2 P3.2 R4.1 R15.2 R16.2 SPI_1.1 SWD1.4 SWD1.6 SWD1.8 SWD1.10 SWD1.12 SWD1.14 SWD1.16 SWD1.18 SWD1.20 SWITCH1.1 U2.10 U2.20 U2.27 U2.74 U2.99 U?.3 U?.6 UART_1.1 UART_2.1 | length 38095.8
  Top Layer w10: C38.2@1615,3885 1615,3886.18 1670,3941.18 C35.2@1670,4055 1670,4056.18 1652.56,4073.62 1606.38,4073.62 1540,4140 1540,4210 1570,4240 1600,4240 1620,4220 C36.2@1665.2,4220 ; C37.2@1737.56,3823.62 1755,3806.18 C37.2@1755,3805 v1(1755,3745) C43.2@1755,3680 C44.2@1755,3610 ; SPI_1.1@1890,3145 2021.38,3013.62 2021.38,3002.44 2038.82,2985 R4.1@2040,2985 ; U2.20@1957.76,3667.16 1958.1,3667.51 2027,3667.51 v1(2084.75,3725.25) 2084.75,3594.75 2038.46,3548.46 U2.27@2038.46,3507.71 2038.46,3468.46 2032.28,3462.28 2007.72,3462.28 1975,3495 v1(1975,3505) ; U2.10@1957.76,3864.01 2004.01,3864.01 v1(2035,3895) ; U2.99@2038.46,4102.2 2038.46,4061.54 2120,3980 v1(2120,3895) ; C41.1@2040,3300 v1(2040,3230) 2040,3160.2 C42.2@2040.2,3160 2040.2,3158.82 2072.64,3126.38 2141.58,3126.38 ; v1(2050,4315) 2070,4295 R16.2@2135,4295 ; R15.2@2235,3250.2 2235,3220 2147.44,3132.44 2147.44,3132.24 2141.58,3126.38 ; C40.1@2470,3250.2 2487.44,3232.76 2526.74,3232.76 2555,3204.5 2555,3173.87 2371.13,2990 2277.96,2990 2141.58,3126.38 ; U2.74@2552.24,4021.49 2701.49,4021.49 C34.1@2705,4025 C39.1@2705,3959.8 2705.2,3960 v1(2770,3960)
  Top Layer w15: SWITCH1.1@1540.29,4769.19 1540.29,4753.44 1613.73,4680
  Top Layer w50: UART_2.1@1120,2670 1044.76,2745.24 1044.76,3165.24 ; UART_1.1@1120,3090 1044.76,3165.24 ; P3.2@2890,3130 2985,3035 3115.21,3035 3154.8,3074.6 C25.2@3154.8,3130 D2.2@3154.8,3230 C5.1@3154.8,3483.83 C6.1@3154.8,3625.89 C7.1@3154.8,3767.94 C8.1@3154.8,3910 ; C2.2@3334.72,3245 3293.39,3245 3272.13,3266.26 3272.13,3428.78 3235.2,3465.7 C4.1@3235.2,3628.22 C3.1@3235.2,3770.28 3191.17,3814.3 3191.17,3910 ; C9.1@3674.8,4470 C10.1@3674.8,4620 3674.8,4633.69 3613.49,4695 D1.2@3505,4695 P2.2@3395.99,4695 3315.99,4775 ; C22.1@3820,3634.8 3819.8,3635 C24.2@3530,3635 C19.1@3530,3815.2 ; C21.1@3820,3815.2 C20.1@3675,3815.2 C19.1@3530,3815.2 ; v1(4015,3915) 4012,3918 CR1.2@4012,4045 4022.5,4045 4055.2,4077.7 U?.3@4055.2,4214.86 ; C28.1@4259,3170.28 C29.1@4388,3170.28 C30.1@4517,3170.28 4547.95,3170.28 4732.68,3355 ; C12.1@4300,2950 C27.1@4515,2950 4625,2950 4732.68,3057.68 4732.68,3355 ; C11.1@4310,3370 4519.72,3370 C32.1@4520,3370.28 4539.53,3389.8 4553.21,3389.8 4732.68,3569.27 ; P1.2@4740,4391.57 4890,4541.57 4890,4745.71 4860.71,4775 3315.99,4775 ; C26.2@4782.68,3942.6 4766.54,3942.6 4732.68,3908.74 4732.68,3569.27 ; 1044.76,3165.24 1044.76,4262.19 1462.57,4680 1613.73,4680 SWD1.20@1700,4680 SWD1.18@1800,4680 SWD1.16@1900,4680 SWD1.14@2000,4680 SWD1.12@2100,4680 SWD1.10@2200,4680 SWD1.8@2300,4680 SWD1.6@2400,4680 SWD1.4@2500,4680 2605.28,4785.28 C17.2@3085,4785.28 ; C17.2@3085,4785.28 3085,4635 3005,4555 3005,4340 3195,4150 3195,3950.2 C8.1@3154.8,3910 ; C17.2@3085,4785.28 3095.28,4775 3315.99,4775 ; C8.1@3154.8,3910 3191.17,3910 ; 3191.17,3910 3300.62,4019.45 3303.38,4019.45 3310.66,4012.17 3310.66,3875.85 3371.31,3815.2 C18.1@3385,3815.2 C19.1@3530,3815.2 ; 4732.68,3355 4732.68,3569.27
  Top Layer w150: P1.2@4740,4391.57 4740,4301.42 4782.68,4258.74 C26.2@4782.68,3942.6
  Bottom Layer w10: v1(1755,3745) 1845,3745 1850,3740 ; SPI_1.1@1890,3145 1975,3230 v1(2040,3230) 2040,3440 v1(1975,3505) ; C33.1@1974.8,4325 1984.8,4315 v1@2039.79,4315 ; v1(2035,3895) 2084.75,3845.25 v1(2084.75,3725.25) 2085.25,3725.75 2085.25,3765.25 2120,3800 v1(2120,3895) 1935,4080 1935,4210.21 v1@2039.79,4315 ; v1(2050,4315) v1@2039.79,4315
  Bottom Layer w25: D7_M12.2@1660,1373.5 1660,1427.25 1690,1457.25 1690,1767.75 1660,1797.75 D8_M12.2@1660,1851.5 1660,2065 1665,2070 ; 2195,2070 2260,2005 D10_M12.2@2260,1851.5 2260,1797.75 2290,1767.75 2290,1457.25 2260,1427.25 D9_M12.2@2260,1373.5 ; D7_M34.2@2835,1373.5 2835,1427.25 2865,1457.25 2865,1767.75 2835,1797.75 D8_M34.2@2835,1851.5 2835,2065 2840,2070 ; D9_M34.2@3435,1373.5 3435,1427.25 3465,1457.25 3465,1767.75 3435,1797.75 D10_M34.2@3435,1851.5 3435,2070 ; D7_M56.2@4010,1373.5 4010,1427.25 4040,1457.25 4040,1767.75 4010,1797.75 D8_M56.2@4010,1851.5 4010,2070 ; 4600,2070 4610,2060 D10_M56.2@4610,1851.5 4610,1797.75 4640,1767.75 4640,1457.25 4610,1427.25 D9_M56.2@4610,1373.5
  Bottom Layer w50: M2_M12.3@1480,1600 1478.27,1601.73 1451.66,1601.73 1390.47,1662.92 1390.47,1811.95 1643.52,2065 1660,2065 ; *1_M12.8@1830,2455 1732.01,2357.01 1582.01,2357.01 *1_M12.1@1480,2255 1665,2070 2195,2070 ; 1845,3745 1630,3960 1630,4123.62 1633.11,4126.73 1633.11,4223.27 1630,4226.38 1630,4608.99 1700,4678.99 SWD1.20@1700,4680 SWD1.18@1800,4680 SWD1.16@1900,4680 SWD1.14@2000,4680 SWD1.12@2100,4680 SWD1.10@2200,4680 SWD1.8@2300,4680 SWD1.6@2400,4680 SWD1.4@2500,4680 ; 1850,3740 1864.75,3725.25 v1(2084.75,3725.25) ; M1_M12.3@2080,1600 2078.27,1601.73 2051.66,1601.73 1990.47,1662.92 1990.47,1865.47 2195,2070 ; *1_M12.15@2180,2255 2180,2085 2195,2070 ; M2_M34.3@2655,1600 2653.27,1601.73 2626.66,1601.73 2565.47,1662.92 2565.47,1980.47 2655,2070 *1_M34.1@2655,2255 2757.01,2357.01 2907.01,2357.01 *1_M34.8@3005,2455 ; M1_M34.3@3255,1600 3253.27,1601.73 3226.66,1601.73 3165.47,1662.92 3165.47,1880.47 3355,2070 *1_M34.15@3355,2255 ; M2_M56.3@3830,1600 3828.27,1601.73 3801.66,1601.73 3740.47,1662.92 3740.47,1980.47 3830,2070 *1_M56.1@3830,2255 3932.01,2357.01 4082.01,2357.01 *1_M56.8@4180,2455 ; v1(4015,3915) 4263.43,3915 P1.2@4740,4391.57 ; M1_M56.3@4430,1600 4428.27,1601.73 4401.66,1601.73 4340.47,1662.92 4340.47,1900.47 4510,2070 4530,2090 *1_M56.15@4530,2255
  Bottom Layer w150: 2195,2070 2655,2070 2840,2070 3355,2070 3435,2070 3830,2070 4010,2070 4510,2070 4600,2070 4740,2210 P1.2@4740,4391.57
  other v1: 1595,4080
M1CTL1: *1_M12.5 U2.97 | length 3509.5
  Top Layer w10: v1(1769.75,2790.25) 1680,2880 1512.72,2880 1280,3112.72 1280,3340 1125,3495 1125,4032.28 1477.72,4385 1836.99,4385 2077.83,4144.16 U2.97@2077.83,4102.2
  Bottom Layer w10: *1_M12.5@1680,2255 1688.68,2255 1871.5,2437.81 1871.5,2688.5 v1(1769.75,2790.25)
M1CTL2: *1_M12.7 U2.98 | length 3452
  Top Layer w10: v1(1810,2830) 1745,2895 1518.93,2895 1295,3118.93 1295,3346.21 1140,3501.21 1140,4026.07 1483.93,4370 1830.78,4370 2058.15,4142.63 U2.98@2058.15,4102.2
  Bottom Layer w10: *1_M12.7@1780,2255 1886.5,2361.5 1886.5,2753.5 v1(1810,2830)
M1EC1: M2_M12.5 U2.81 | length 3464.6
  Top Layer w10: U2.81@2392.8,4102.2 2392.8,4047.92 2440,4000.71 v1(2440,3998.92)
  Bottom Layer w10: M2_M12.5@1480,1400 1310,1570 1310,2380 1795,2865 2143.35,2865 2425,3146.65 2425,3915 2440.36,3930.36 2440.36,3998.57 v1(2440,3998.92)
M1EC2: M2_M12.6 U2.82 | length 3560
  Top Layer w10: U2.82@2373.11,4102.2 2373.11,4046.39 2405,4014.5 2405,3955.71 v1(2405.36,3955.36)
  Bottom Layer w10: M2_M12.6@1480,1300 1295,1485 1295,2386.21 1788.79,2880 2137.13,2880 2410,3152.87 2410,3950.71 v1(2405.36,3955.36)
M2CTL1: *1_M12.10 U2.1 | length 3235.5
  Top Layer w10: v1(1865,2830) 1785,2910 1525.15,2910 1310,3125.15 1310,3352.43 1155,3507.43 1155,4019.85 1490.15,4355 1819.85,4355 1900,4274.85 1900,4060 1918.74,4041.26 1957.68,4041.26 U2.1@1957.76,4041.18
  Bottom Layer w10: v1(1865,2830) 1930,2765 *1_M12.10@1930,2455
M2CTL2: *1_M12.12 U2.2 | length 3267.6
  Top Layer w10: v1(1920,2830) 1825,2925 1531.36,2925 1325,3131.36 1325,3358.64 1170,3513.64 1170,4013.64 1496.36,4340 1813.64,4340 1885,4268.64 1885,4053.79 1916.95,4021.84 1957.41,4021.84 U2.2@1957.76,4021.49
  Bottom Layer w10: v1(1920,2830) 1945,2805 1945,2540 *1_M12.12@2030,2455
M2EC1: M1_M12.5 U2.83 | length 4324.9
  Top Layer w10: U2.83@2353.43,4102.2 2353.43,4027.4 2370,4010.82 v1(2370,4000)
  Bottom Layer w10: M1_M12.5@2080,1400 1915,1235 1440,1235 1280,1395 1280,2392.43 1782.57,2895 2130.92,2895 2395,3159.08 2395,3916.21 2370,3941.21 v1(2370,4000)
M2EC2: M1_M12.6 U2.84 | length 4316.5
  Top Layer w10: U2.84@2333.74,4102.2 2333.74,4023.29 2335,4022.03 v1(2335,3955)
  Bottom Layer w10: M1_M12.6@2080,1300 2000,1220 1433.79,1220 1265,1388.79 1265,2398.64 1776.36,2910 2124.71,2910 2380,3165.29 2380,3910 v1(2335,3955)
M3CTL1: *1_M34.5 U2.3 | length 4528.9
  Top Layer w10: U2.3@1957.76,4001.81 1957.41,4002.15 1915.42,4002.15 1870,4047.57 1870,4262.43 1807.43,4325 1502.57,4325 1185,4007.43 1185,3519.85 1340,3364.85 1340,3137.57 1537.57,2940 1865,2940 v1(1975,2830)
  Bottom Layer w10: v1(1975,2830) 1975,2578.79 1983.79,2570 2948.68,2570 3046.5,2472.19 3046.5,2437.81 2863.68,2255 *1_M34.5@2855,2255